# Altium PCB PCB1.PcbDoc (part 1 of 2)
Units mm, origin at the board's own origin, x right, y up, seen from the top; angles counter-clockwise.
Board outline 64.18 x 46.75 mm, 2 copper layers (Top Layer, Bottom Layer); 48 components, 57 nets, 248 pads, 92 vias.
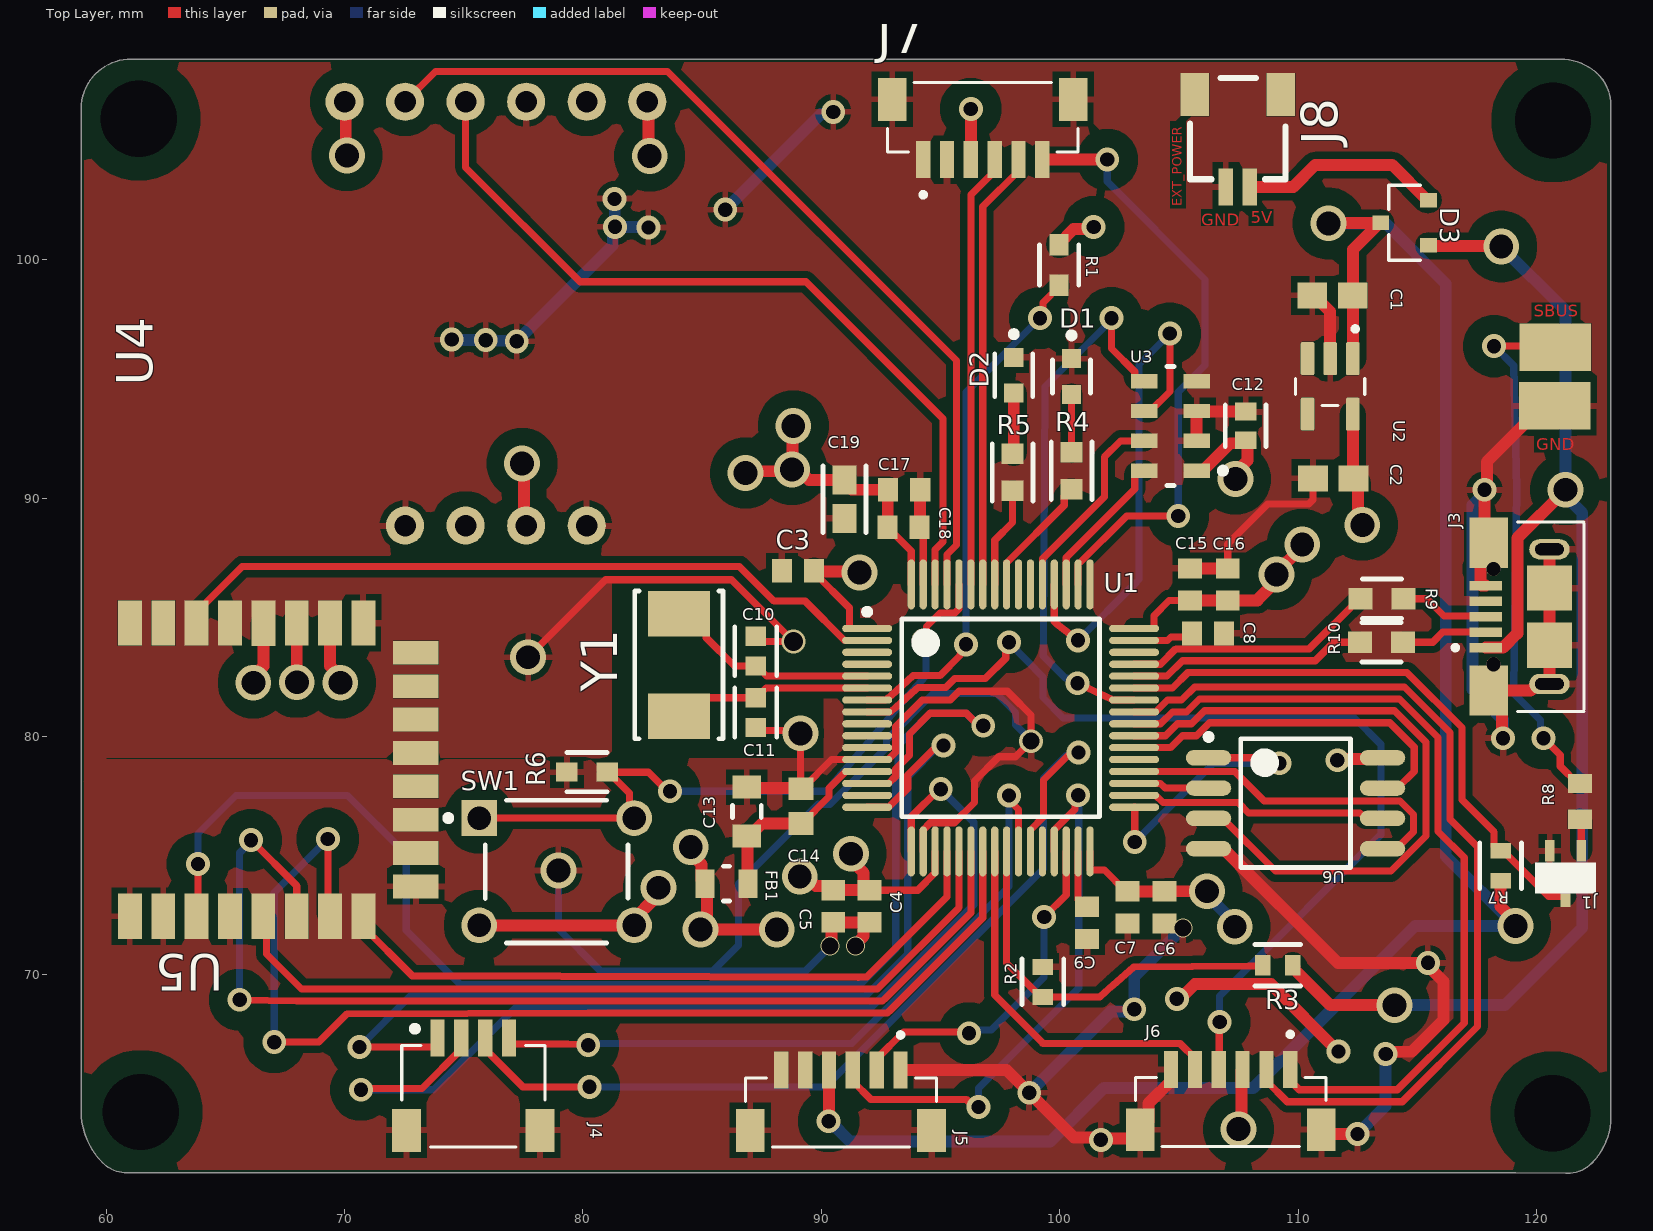
[diagram p0: Top Layer view]
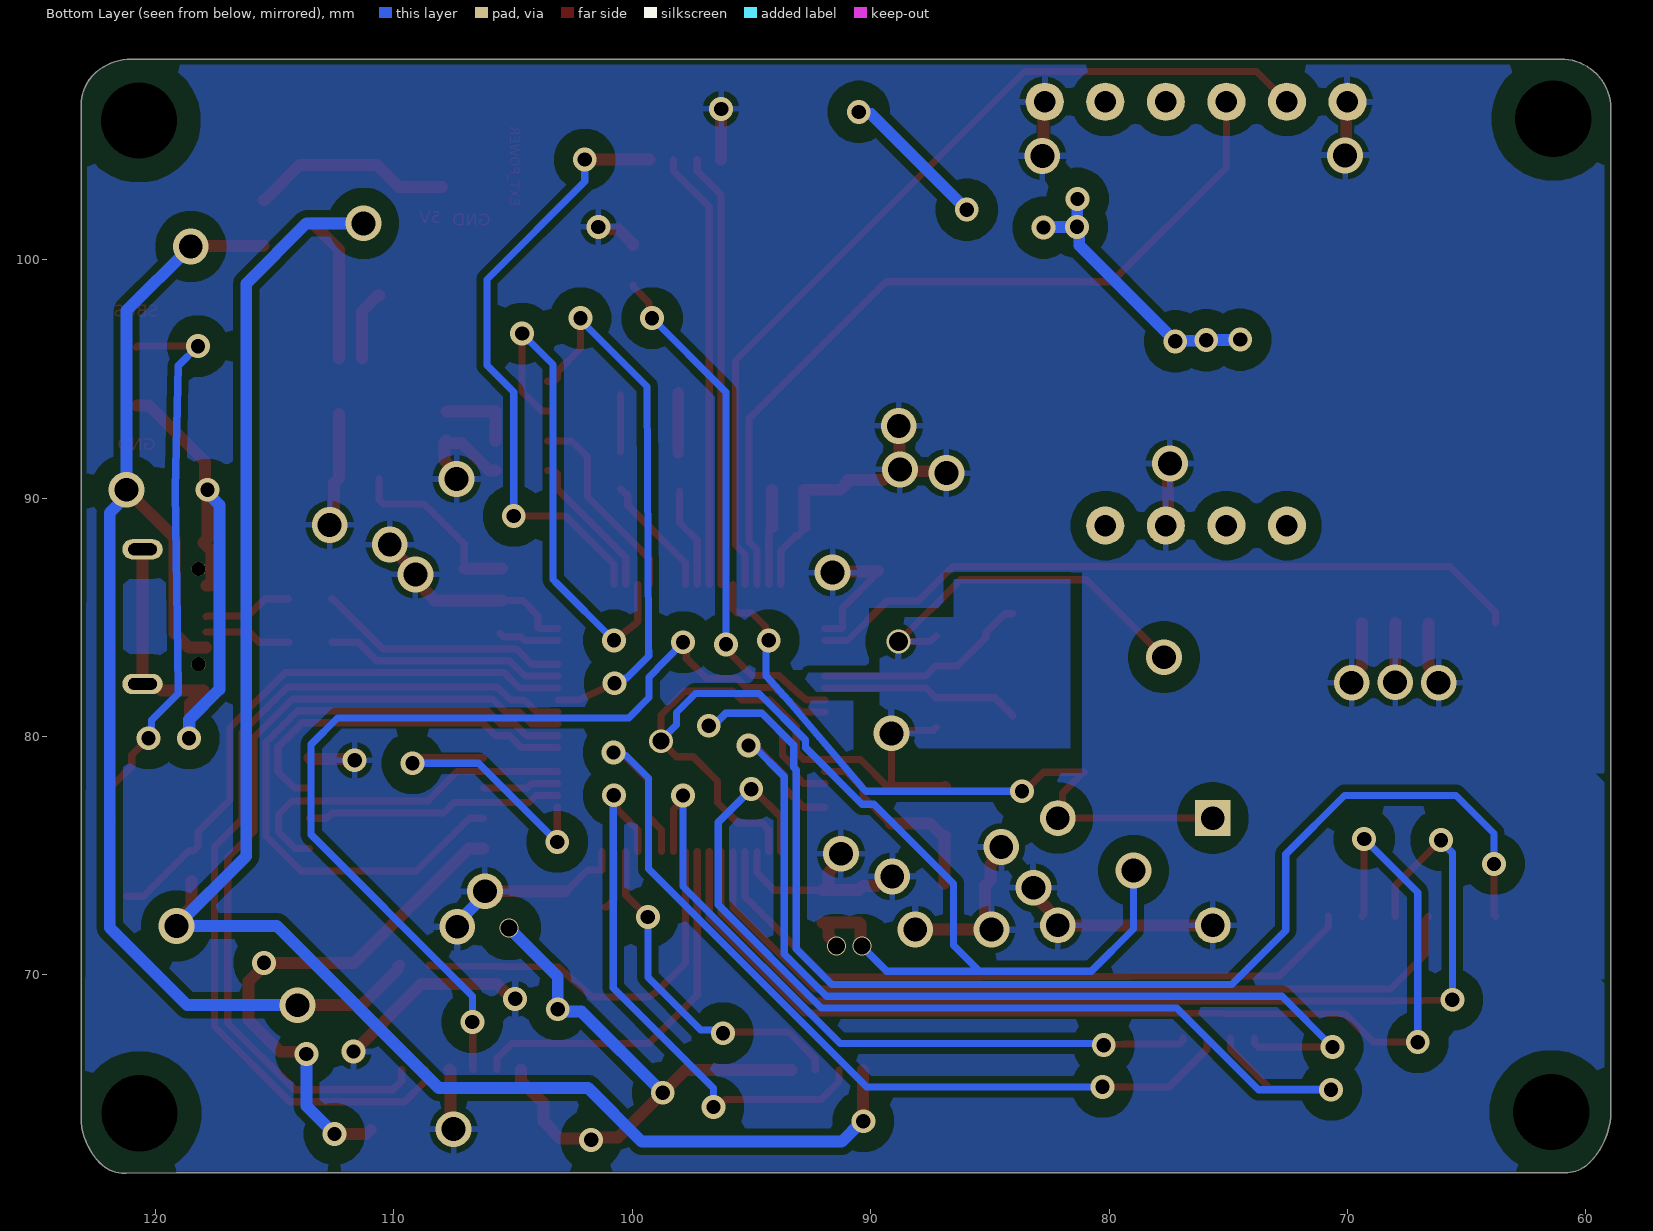
[diagram p1: Bottom Layer view, seen from below]
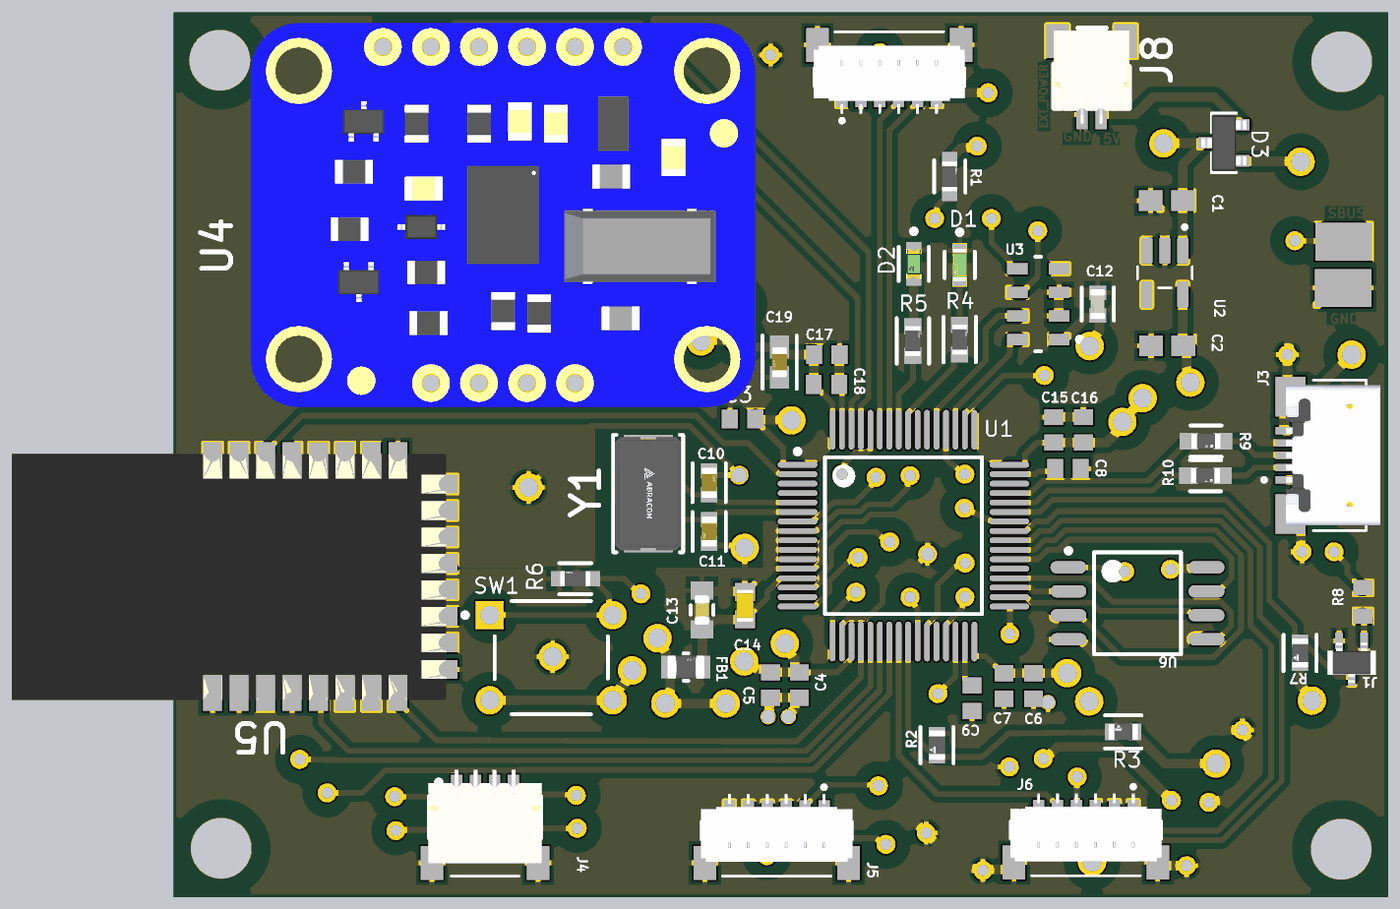
[diagram p2: 3D render of the assembled board from above, using the file's embedded part models]

## Layer stack, top to bottom
Top Solder: solder mask 0.0102, Solder Resist, Dk 3.5
Top Layer: signal copper 0.0356
Dielectric 1: dielectric 0.32, FR-4, Dk 4.8
Bottom Layer: signal copper 0.0356
Bottom Solder: solder mask 0.0102, Solder Resist, Dk 3.5

## Board outline
58.946,64.289 58.946,106.337 cw(c61.012,106.337) 59.551,107.797 cw(c61.048,106.3) 61.048,108.417 66.496,108.417 118.949,108.417 119.196,108.417 121.01,108.416 cw(c121.01,106.124) 122.631,107.744 122.6,107.767 cw(c121.324,106.491) 123.129,106.491 123.129,64.034 cw(c120.385,64.034) 122.325,62.094 cw(c121.299,63.12) 121.299,61.669 121.225,61.669 119.135,61.694 119.075,61.694 60.875,61.694 cw(c60.875,63.151) 59.844,62.121 cw(c62.012,64.289)

## Design rules (kind name [scope] priority, off if disabled: settings)
Clearance [All] p1: gap=0 ignorepadtopadclearanceinfootprint=FALSE except(0.2: Arc-Arc Arc-Track Track-Track; 0.3: Arc-Fill Arc-Poly Arc-Region Track-Fill Track-Poly Track-Region THPad-Fill THPad-Poly THPad-Region Via-Fill Via-Poly Via-Region Fill-Fill Fill-Poly Fill-Region Poly-Poly Poly-Region Region-Region; 0.7: Arc-Via Track-Via SMDPad-Via THPad-Via Via-Via; 1: Fill-Hole Poly-Hole Region-Hole)
PolygonConnect [All] p1: connectstyle=Relief reliefconductorwidth=0.254 reliefentries=4 polygonreliefangle="90 Angle" airgapwidth=0.254
RoutingVias [All] p1: holewidth=0.711 width=1.27 viastyle="Through Hole" minholewidth=0.711 minwidth=1.27 maxholewidth=0.711 maxwidth=1.27
SolderMaskExpansion [All] p1: expansion=0.102 istentingtop=FALSE
SupplyNets "Schematic Supply Nets_5" [InNet('3.3VA')] p1: voltage=0.000
SupplyNets "Schematic Supply Nets_4" [InNet('GND')] p2: voltage=0.000
SupplyNets "Schematic Supply Nets_3" [InNet('+5')] p3: voltage=0.000
SupplyNets "Schematic Supply Nets_2" [InNet('VDD')] p4: voltage=0.000
SupplyNets "Schematic Supply Nets_1" [InNet('5V_USB')] p5: voltage=0.000
SupplyNets "Schematic Supply Nets" [InNet('EXT_5V')] p6: voltage=0.000
UnRoutedNet [All] p1: checkbadconnections=TRUE
Width [All] p1: maxlimit=1 minlimit=0.3 preferedwidth=0.3
29 further rules are at their usual default settings.

## Classes and differential pairs
component class Sheet3: J3 J4 J5 J6 J7 J8 R9 R10
component class Sheet2: C12 J1 R7 R8 U3 U4 U5 U6
component class Sheet1: C1 C2 C3 C4 C5 C6 C7 C8 C9 C10 C11 C13 C14 C15 C16 C17 C18 C19 D1 D2 D3 FB1 R1 R2 R3 R4 R5 R6 SW1 U1 U2 Y1

## Components (designator, comment, footprint, x,y, rotation, side; value= is the part's Value field where it differs from the comment)
C1 "0603YG105ZAT4A" CAPC1608X90X35ML15T15 111.45,98.5 r0 top
C2 "0603YG105ZAT4A" CAPC1608X90X35ML15T15 111.475,90.825 r0 top
C3 "VJ0603Y104KXXAP" CAPC1608X92X38NL15T08 89.025,86.95 r0 top
C4 "VJ0603Y104KXXAP" CAPC1608X92X38NL15T08 92.025,72.875 r90 top
C5 "VJ0603Y104KXXAP" CAPC1608X92X38NL15T08 90.5,72.875 r90 top
C6 "VJ0603Y104KXXAP" CAPC1608X92X38NL15T08 104.4,72.825 r90 top
C7 "VJ0603Y104KXXAP" CAPC1608X92X38NL15T08 102.85,72.825 r90 top
C8 "VJ0603Y104KXXAP" CAPC1608X92X38NL15T08 106.225,84.325 r180 top
C9 "VJ0603Y104KXXAP" CAPC1608X92X38NL15T08 101.15,72.175 r90 top
C10 "06035A220JAT2A" FP-0603-L_1_6_0_15-W_0_81-IPC_C 87.25,83.575 r90 top
C11 "06035A220JAT2A" FP-0603-L_1_6_0_15-W_0_81-IPC_C 87.25,80.999 r270 top
C12 "C0603C104K4RACTU" FP-C0603C-CF-MFG 107.8,93.025 r90 top value="0.10 μF"
C13 "CGA3E2X7R1H104K080AA" FP-CGA3E-0_3-0_1-IPC_A 86.875,76.85 r90 top
C14 "GRM188R71H103KA01D" CAPC1608X90X35ML10T15 89.15,77.075 r270 top
C15 "VJ0603Y104KXXAP" CAPC1608X92X38NL15T08 105.475,86.375 r270 top
C16 "VJ0603Y104KXXAP" CAPC1608X92X38NL15T08 107.05,86.375 r270 top
C17 "VJ0603Y104KXXAP" CAPC1608X92X38NL15T08 93.475,90.35 r180 top
C18 "VJ0603Y104KXXAP" CAPC1608X92X38NL15T08 93.45,88.775 r180 top
C19 "GRM188R60J106ME47D" FP-GRM188-0_1-e0_2_0_55-IPC_A 90.975,89.95 r270 top
D1 "LG L29K-G2J1-24-Z" FP-LG_L29K-MFG 100.5,95.1 r270 top
D2 "VLMS1300-GS08" FP-6_541-5092_01-4-MFG 98.075,95.15 r270 top
D3 "BAT54C" SOT23-R 114.475,101.55 r90 top
FB1 "MPZ2012S101ATD25" FP-MPZ2012-MFG 86.025,73.825 r0 top
J1 "BC817W,115" SOT323 121.225,73.425 r180 top
J3 "U254-051T-4BH83-F1S" XKB_U254-051T-4BH83-F1S 120.55,85.025 r90 top
J4 "SM04B-SRSS-TB(LF)(SN)" JST_SM04B-SRSS-TB(LF)(SN) 75.4,67.35 r0 top
J5 "BM06B-SRSS-TB(LF)(SN)" JST_BM06B-SRSS-TB(LF)(SN) 90.825,64.225 r180 top
J6 "BM06B-SRSS-TB(LF)(SN)" JST_BM06B-SRSS-TB(LF)(SN) 107.175,64.25 r180 top
J7 "BM06B-SRSS-TB(LF)(SN)" JST_BM06B-SRSS-TB(LF)(SN) 96.775,105.975 r0 top
J8 "SM02B-SRSS-TB(LF)(SN)" SM02B-SRSS-TB(LF)(SN) 107.475,105.025 r180 top
R1 "AC0603FR-0710KL" FP-AC0603-MFG 99.975,99.775 r90 top
R2 "MCT06030C1002FP500" FP-MCT0603-IPC_C 99.3,69.7 r270 top
R3 "MCT06030C1002FP500" FP-MCT0603-IPC_C 109.15,70.4 r180 top
R4 "AC0603FR-071KL" FP-AC0603-IPC_B 100.5,91.15 r90 top
R5 "AC0603FR-071KL" FP-AC0603-IPC_B 98.025,91.075 r90 top
R6 "AC0603FR-0710KL" FP-AC0603-MFG 80.175,78.5 r180 top
R7 "MCT06030C1002FP500" FP-MCT0603-IPC_C 118.5,74.575 r270 top
R8 "RC0603JR-074K7L" RESC1608X55X25ML10T15 121.825,77.275 r270 top
R9 "CPF0603B22RE1" FP-CPF0603-MFG 113.525,85.775 r180 top value=22Ω
R10 "CPF0603B22RE1" FP-CPF0603-MFG 113.5,83.95 r180 top value=22Ω
SW1 "1825910-6" TECO-1825910-6_V 78.9,74.325 r0 top
U1 "STM32F405RGT6" STM-LQFP64_M 97.527,80.779 r0 top
U2 "MIC5504-3.3YM5_TR" SOT95P280X145-5N 111.35,94.685 r270 top
U3 "MS561101BA03-50" MSI-MS561101BA03-50-8_V 104.65,93.025 r180 top
U4 "BNO055" BNO055_MOD 63.015,87.575 r0 top
U5 "Component_2" BU01 73.368,85.108 r180 top
U6 "W25Q128FVSIG" WINB-SOIC-8_M 109.9,77.2 r0 top
Y1 "ABM7-8.000MHZ-8-R80-D2Y-T" FP-ABM7-MFG 84.025,83 r270 top

## Footprints (in the part's own frame and the unit in brackets; to place one, negate y for a bottom-side part, rotate by r counter-clockwise, add the part's x,y. Pads: shape width x height; smd on the part's side, far side on the other; paste and mask are expansions set on the pad)
BNO055_MOD [mm]
  round 1.6 hole 0.9: 1(19.685,19.05) 2(17.145,19.05) 3(14.605,19.05) 4(12.065,19.05) 5(9.525,19.05) 6(6.985,19.05) 7(17.145,1.27) 8(14.605,1.27) 9(12.065,1.27) 10(9.525,1.27)
  body extent 0,0 26.67,20.32, height 3.23
BU01 [mm]
  rect 1x1.9 smd: 1(12.375,0.35) 2(10.975,0.35) 3(9.575,0.35) 4(8.175,0.35) 5(6.768,0.358) 6(5.375,0.35) 7(3.975,0.35) 8(2.575,0.35) 17(2.575,12.65) 18(3.975,12.65) 19(5.375,12.65) 20(6.775,12.65) 21(8.175,12.65) 22(9.575,12.65) 23(10.975,12.65) 24(12.375,12.65)
  rect 1.9x1 smd: 9(0.375,1.6) 10(0.375,3) 11(0.375,4.4) 12(0.375,5.8) 13(0.375,7.2) 14(0.375,8.6) 15(0.375,10) 16(0.375,11.4)
  body extent 0.02,0.01 23.02,13.01
CAPC1608X90X35ML10T15 [mm] "Chip Capacitor, 2-Leads, Body 1.7x0.9mm, IPC Low Density"
  rect 0.95x1.05 smd: 1(-0.725,0) 2(0.725,0)
  body extent -0.85,-0.45 0.85,0.45, height 0.9
CAPC1608X90X35ML15T15 [mm] "Chip Capacitor, 2-Leads, Body 1.60x0.81mm, IPC Low Density"
  rect 1.25x1.1 smd: 1(-0.85,0) 2(0.85,0)
  body extent -0.88,-0.48 0.87,0.48, height 0.9
CAPC1608X92X38NL15T08 [mm] "Chip Capacitor, 2-Leads, Body 1.60x0.80mm, IPC Medium Density"
  rect 0.85x1 smd: 1(-0.675,0) 2(0.675,0)
  body extent -0.87,-0.48 0.87,0.47, height 0.92
FP-6_541-5092_01-4-MFG [mm]
  rect 0.8x0.8 smd paste+0 mask+0: 1(-0.75,0) 2(0.75,0)
  silkscreen extent -1.85,-0.8 0.9,0.8, body extent -1.25,-0.6 1.25,0.6, height 0.25
FP-0603-L_1_6_0_15-W_0_81-IPC_C [mm]
  rect 0.807x0.868 smd paste+0 mask+0: 1(-0.626,0) 2(0.626,0)
  silkscreen extent -1.03,-0.88 1.03,0.88, body extent -1.13,-0.58 1.13,0.58, height 0.25
FP-ABM7-MFG [mm]
  rect 1.9x2.6 smd paste+0 mask+0: 1(-2.15,0) 2(2.15,0)
  silkscreen extent -3.1,-1.85 3.1,1.85, body extent -3.2,-1.95 3.2,1.95, height 0.25
FP-AC0603-IPC_B [mm]
  rect 0.859x0.912 smd paste+0 mask+0: 1(-0.777,0) 2(0.777,0)
  silkscreen extent -1.21,-0.86 1.21,0.86, body extent -1.46,-0.71 1.46,0.71, height 0.25
FP-AC0603-MFG [mm]
  rect 0.9x0.8 smd paste+0 mask+0: 1(-0.85,0) 2(0.85,0)
  silkscreen extent -0.85,-0.82 0.85,0.82, body extent -1.4,-0.55 1.4,0.55, height 0.25
FP-C0603C-CF-MFG [mm]
  rect 0.75x0.9 smd paste+0 mask+0: 1(-0.6,0) 2(0.6,0)
  silkscreen extent -0.87,-0.85 0.88,0.85, body extent -1.2,-0.6 1.2,0.6, height 0.25
FP-CGA3E-0_3-0_1-IPC_A [mm]
  rect 0.956x1.206 smd paste+0 mask+0: 1(-1.025,0) 2(1.025,0)
  silkscreen extent -0.25,-0.6 0.25,0.6, body extent -2,-1.1 2,1.1, height 0.25
FP-CPF0603-MFG [mm]
  rect 1x0.9 smd paste+0 mask+0: 1(-0.9,0) 2(0.9,0)
  silkscreen extent -0.82,-0.82 0.82,0.82, body extent -1.5,-0.55 1.5,0.55, height 0.25
FP-GRM188-0_1-e0_2_0_55-IPC_A [mm]
  rect 1.208x1.012 smd paste+0 mask+0: 1(-0.802,0) 2(0.802,0)
  silkscreen extent -1.41,-0.91 1.41,0.91, body extent -1.91,-1.01 1.91,1.01, height 0.25
FP-LG_L29K-MFG [mm]
  rect 0.8x0.8 smd paste-1000 mask+0: 1(-0.75,0) 2(0.75,0)
  silkscreen extent -1.85,-0.8 0.7,0.8, body extent -1.25,-0.55 1.25,0.55, height 0.25
FP-MCT0603-IPC_C [mm]
  rect 0.664x0.862 smd paste+0 mask+0: 1(-0.629,0) 2(0.629,0)
  silkscreen extent -0.96,-0.87 0.96,0.87, body extent -1.06,-0.58 1.06,0.58, height 0.25
FP-MPZ2012-MFG [mm]
  rect 0.8x1.2 smd paste+0 mask+0: 1(-0.9,0) 2(0.9,0)
  silkscreen extent -0.13,-0.72 0.13,0.72, body extent -1.4,-0.82 1.4,0.82, height 0.25
JST_BM06B-SRSS-TB(LF)(SN) [mm]
  rect 0.6x1.55 smd: 1(-2.5,-1.775) 2(-1.5,-1.775) 3(-0.5,-1.775) 4(0.5,-1.775) 5(1.5,-1.775) 6(2.5,-1.775)
  rect 1.2x1.8 smd: S1(-3.8,0.75) S2(3.8,0.75)
  silkscreen extent -4,-3.35 4,1.45, body extent -4,-2.9 4,0.7, height 4.25
JST_SM04B-SRSS-TB(LF)(SN) [mm]
  rect 0.6x1.55 smd: 1(-1.5,0) 2(-0.5,0) 3(0.5,0) 4(1.5,0)
  rect 1.2x1.8 smd: S1(-2.8,-3.875) S2(2.8,-3.875)
  silkscreen extent -3,-4.57 3,0.48, body extent -3,-3.9 3,1.05, height 3.25
MSI-MS561101BA03-50-8_V [mm] "SMD, 8-Leads, Body 5x3mm, Pitch 1.25mm"
  rect 1.1x0.6 smd: 1(-1.1,1.875) 2(-1.1,0.625) 3(-1.1,-0.625) 4(-1.1,-1.875) 5(1.1,-1.875) 6(1.1,-0.625) 7(1.1,0.625) 8(1.1,1.875)
  silkscreen extent -2.32,-2.5 0.15,2.5, body extent -1.5,-2.5 1.5,2.5, height 1
RESC1608X55X25ML10T15 [mm] "Chip Resistor, 2-Leads, Body 1.60x0.80mm, IPC Low Density"
  rect 0.8x1 smd: 1(-0.75,0) 2(0.75,0)
  body extent -0.85,-0.45 0.85,0.45, height 0.55
SM02B-SRSS-TB(LF)(SN) [mm]
  rect 0.6x1.55 smd: 1(-0.5,1.975) 2(0.5,1.975)
  rect 1.2x1.8 smd: 3(-1.8,-1.9) 4(1.8,-1.9)
  silkscreen extent -2,-2.6 2,1.65, body extent -2,-2.47 2,2.47, height 2.95
SOT23-R [mm]
  rect 0.6x0.7 smd: 1(-0.95,-1) 2(0.95,-1) 3(0,1)
  silkscreen extent -1.57,-0.65 1.57,0.66, body extent -1.46,-1.2 1.46,1.2, height 1.2
SOT95P280X145-5N [mm]
  rrect25% 1.39x0.58 smd: 1(-1.165,0.95) 2(-1.165,0) 3(-1.165,-0.95) 4(1.165,-0.95) 5(1.165,0.95)
  silkscreen extent -2.51,-1.45 0.8,1.45, body extent -2.54,-2.54 2.54,2.54, height 2.54
SOT323 [mil]
  rect 16x35 smd: BASE(-26,-70) COLLECTOR(0,5) EMITTER(26,-70)
  silkscreen extent -50,-50 50,0, body extent -39,-66 39,16, height 43
STM-LQFP64_M [mm] "Thin QFP, 64-Leads, Body 10x10mm, Pitch 0.5mm, IPC Low Density"
  oval 2.1x0.3 smd: 1(-5.6,3.75) 2(-5.6,3.25) 3(-5.6,2.75) 4(-5.6,2.25) 5(-5.6,1.75) 6(-5.6,1.25) 7(-5.6,0.75) 8(-5.6,0.25) 9(-5.6,-0.25) 10(-5.6,-0.75) 11(-5.6,-1.25) 12(-5.6,-1.75) 13(-5.6,-2.25) 14(-5.6,-2.75) 15(-5.6,-3.25) 16(-5.6,-3.75) 33(5.6,-3.75) 34(5.6,-3.25) 35(5.6,-2.75) 36(5.6,-2.25) 37(5.6,-1.75) 38(5.6,-1.25) 39(5.6,-0.75) 40(5.6,-0.25) 41(5.6,0.25) 42(5.6,0.75) 43(5.6,1.25) 44(5.6,1.75) 45(5.6,2.25) 46(5.6,2.75) 47(5.6,3.25) 48(5.6,3.75)
  oval 0.3x2.1 smd: 17(-3.75,-5.6) 18(-3.25,-5.6) 19(-2.75,-5.6) 20(-2.25,-5.6) 21(-1.75,-5.6) 22(-1.25,-5.6) 23(-0.75,-5.6) 24(-0.25,-5.6) 25(0.25,-5.6) 26(0.75,-5.6) 27(1.25,-5.6) 28(1.75,-5.6) 29(2.25,-5.6) 30(2.75,-5.6) 31(3.25,-5.6) 32(3.75,-5.6) 49(3.75,5.6) 50(3.25,5.6) 51(2.75,5.6) 52(2.25,5.6) 53(1.75,5.6) 54(1.25,5.6) 55(0.75,5.6) 56(0.25,5.6) 57(-0.25,5.6) 58(-0.75,5.6) 59(-1.25,5.6) 60(-1.75,5.6) 61(-2.25,5.6) 62(-2.75,5.6) 63(-3.25,5.6) 64(-3.75,5.6)
  silkscreen extent -5.72,-4.15 4.15,4.57, body extent -5,-5 5,5, height 1.6
TECO-1825910-6_V [mm] "Switch, 4-Leads, Body 5.99x5.99mm"
  rect 1.5x1.5 hole 0.99: 1(-3.25,2.25)
  round 1.5 hole 0.99: 2(3.25,2.25) 3(-3.25,-2.25) 4(3.25,-2.25)
  silkscreen extent -4.67,-2.99 2.99,3, body extent -3,-2.99 2.99,3, height 5
WINB-SOIC-8_M [mm] "SOIC, 8-Leads, Body 5.4x5.4mm, Pitch 1.27mm, IPC Low Density"
  oval 1.9x0.65 smd: 1(-3.65,1.905) 2(-3.65,0.635) 3(-3.65,-0.635) 4(-3.65,-1.905) 5(3.65,-1.905) 6(3.65,-0.635) 7(3.65,0.635) 8(3.65,1.905)
  silkscreen extent -3.77,-2.7 2.3,2.9, body extent -2.7,-2.7 2.7,2.7, height 2.16
XKB_U254-051T-4BH83-F1S [mm]
  rect 0.4x1.35 smd: 1(-1.3,2.675) 2(-0.65,2.675) 3(0,2.675) 4(0.65,2.675) 5(1.3,2.675)
  rect 2.1x1.6 smd: S1(-3.1,2.55) S2(3.1,2.55)
  rect 1.9x1.9 smd: S3(-1.2,0) S4(1.2,0)
  oval 0.85x1.7 hole 0.5 slot 1.2 at 90 deg: S5(-2.825,0) S6(2.825,0)
  round 0.6 hole 0.6 unplated: ""(-2,2.35) ""(2,2.35)
  silkscreen extent -3.98,-1.45 3.98,4.05, body extent -3.7,-2.2 3.7,2.8, height 2.3

## Part data
C1 C2: library part CMP-2006-04543-1, Manufacturer="AVX Interconnect / Elco", Part Number=0603YG105ZAT4A
C3 C4 C5 C6 C7 C15 C16 C17 C18: library part CMP-2006-01166-1, Manufacturer=Vitramon, Part Number=VJ0603Y104KXXAP
C8 C9: library part CMP-2006-01166-1, "100nf", Manufacturer=Vitramon, Part Number=VJ0603Y104KXXAP
C10 C11: library part CMP-2006-04207-3, "General Purpose Ceramic Capacitor, 0603, 22pF, 5%, NP0, 30ppm/°C, 50V", Capacitance=22pF, Case Code (Imperial)=0603, Case Code (Metric)=1608, Dielectric=C0G, Dielectric Material=Ceramic, Insulation Resistance=100GR, Max Operating Temperature=125°C, Min Operating Temperature=-55°C, Package Quantity=1, Temperature Coefficient=30ppm/°C, Tolerance=5%, Voltage=50V, Case/Package=0603, Contact Plating=Tin, Depth=0.81mm, Height=0.63mm, Lead Free="Lead Free", Length=1.6mm, Mount="Surface Mount", Number of Pins=2, Packaging="Tape and Reel", Radiation Hardening=No, REACH SVHC="No SVHC", RoHS Compliant=Yes, Termination=SMD/SMT, Thickness=0.035inch, Voltage Rating=50V, Voltage Rating (DC)=50V, Width=0.81mm
C12: library part CMP-2006-03811-3, "Capacitor; Ceramic; Cap; .100uF; Tol 10%; SMT; Vol-Rtg 16V; X7R; Tape and Reel", Capacitance="0.10 μF", Manufacturer=KEMET, Package=C0603C-CF, Temperature="-55°C to +125°C", Temperature Characteristic=X7R, Temperature Coefficient=30ppm/°C, Temperature Range High=+125°C, Temperature Range Low=-55°C, Tolerance=0.1, Voltage Rating="16 V", Automotive=Yes, Automotive Grade="Grade 1", Category=Cap, ComponentLink2Description=Datasheet, ComponentLink2URL=https://api.kemet.com/component-edge/download/datasheet/C0603C100J5GACAUTO.pdf, Device Class L1="Passive Components", Device Class L2=Capacitors, Device Class L3="Ceramic Capacitors", Digikey Description="Capacitor; Ceramic; Cap; .100uF; Tol 10%; SMT; Vol-Rtg 16V; X7R; Tape and Reel", Height=0.87mm, Lead Free=Yes, Manufacturer Part Number=C0603C104K4RACTU, Material=Ceramic, Mouser Description="Multilayer Ceramic Capacitors MLCC - SMD/SMT 16volts 0.1uF 10% X7R 10%", Octopart=https://octopart.com/c0603c104k4ractu-kemet-93067, RoHS=TRUE
C13: library part CMP-2000-07546-2, "Cap Ceramic 100nF 50V X7R 10% Pad SMD 0603 +125°C Automotive T/R", Capacitance=100nF, Case Code (Imperial)=0603, Case Code (Metric)=1608, Dielectric=X7R, Max Operating Temperature=125°C, Min Operating Temperature=-55°C, Package Quantity=1, Ratings=AEC-Q200, Tolerance=10%, Voltage=50V, Case/Package=0603, Composition=Ceramic, Depth=0.8mm, Height=0.8mm, Lead Free="Lead Free", Length=1.6mm, Mount="Surface Mount", Packaging="Tape and Reel", Radiation Hardening=No, REACH SVHC="No SVHC", Termination=SMD/SMT, Thickness=0.035inch, Voltage Rating=50V, Voltage Rating (DC)=50V, Weight=7.1E-05oz, Width=0.8mm
C14: library part CMP-2100-03642-1, "Chip Capacitor, 10 nF, +/- 10%, 50 V, -55 to 125 degC, 0603 (1608 Metric), RoHS, Tape and Reel", Capacitance=10nF, Case Code (Imperial)=0603, Case Code (Metric)=1608, Dielectric=X7R, Dielectric Material=Ceramic, Insulation Resistance=10GR, Manufacturer=Murata, Max Operating Temperature=125degC, Min Operating Temperature=-55degC, Package Description="2-Pin Surface Mount Device, Body 1.6 x 0.8 mm", Package Quantity=1, Tolerance=10%, Voltage=50V, Case/Package=0603, Datasheet URL=http://search.murata.co.jp/Ceramy/image/img/A01X/G101/ENG/GRM188R71H103KA01-01.pdf, Datasheet Version=42401.0, Depth=0.8mm, Height=0.8mm, Lead Free=LeadFree, Length=1.6mm, Manufacturer URL=http://www.murata.com/, Material=Ceramic, Mount=SurfaceMount, Number of Pins=2, Package Reference=0603, Packaging=TapeandReel, REACH SVHC=Unknown, RoHSCompliant=True, Termination=SMD/SMT, Thickness=0.035inch, Voltage Rating=50V, Voltage Rating (DC)=50V, Width=0.031inch
C19: library part CMP-2006-02792-2, "Chip Multilayer Ceramic Capacitors for General Purpose, 0603, 10uF, X5R, 15%, 20%, 6.3V", Capacitance=10uF, Case Code (Imperial)=0603, Case Code (Metric)=1608, Dielectric=X5R, Max Operating Temperature=85°C, Min Operating Temperature=-55°C, Package Quantity=4000, Tolerance=20%, Voltage=6.3V, Case/Package=0603, Depth=0.8mm, Height=0.8mm, Lead Free="Lead Free", Length=1.6mm, Material=Ceramic, Mount="Surface Mount", Packaging="Tape and Reel", Radiation Hardening=No, REACH SVHC="No SVHC", Termination=SMD/SMT, Thickness=0.035inch, Voltage Rating=6.3V, Voltage Rating (DC)=6.3V, Width=0.031inch
D1: library part CMP-62016-000024-1, "LED GREEN DIFFUSED 0603 SMD", Case Code (Imperial)=0603, Case Code (Metric)=1608, Color=Green, Forward Current=20mA, Forward Voltage=2.2V, Lens Color=White, Max Operating Temperature=100°C, Min Operating Temperature=-40°C, Package Quantity=5000, Reverse Voltage=12V, Test Current=2mA, Case/Package=0603, Depth=0.8mm, Dominant Wavelength=570nm, Height=0.65mm, Illumination Color=Green, Length=1.3mm, Lens Size=0.8mm, Lens Style=Flat, Lens Transparency=Diffused, Luminous Flux=0.012lm, Luminous Intensity=5.6mcd, Mount="Surface Mount", Number of Elements=1, Number of LEDs=1, Number of Pins=2, Packaging="Tape and Reel", Radiation Hardening=No, Viewing Angle=160°, Width=0.8mm
D2: library part CMP-02520-000012-1, "LED RED 0603 SMD", Ambient Temperature Range High=+85°C, Ambient Temperature Range Low=-35°C, Colour=Red, Forward Current=20mA, Forward Voltage=2V, Manufacturer=Vishay, Package=6.541-5092.01-4, Power Dissipation=75mW, Reverse Voltage=5V, Temperature="-35°C to +85°C", Automotive=No, Category=Diode, ComponentLink2Description=Datasheet, ComponentLink2URL=http://www.vishay.com/docs/82437/vlmo1300.pdf, Device Class L1=Optoelectronics, Device Class L2=LEDs, Device Class L3=unset, Digikey Description="LED RED 0603 SMD", Height=1mm, Lead Free=Yes, Led Orientation="Top View", Luminous Intensity=54mcd, Manufacturer Part Number=VLMS1300-GS08, Mouser Description="Standard LEDs - SMD Super Red Clear Non-Diff", Octopart=https://octopart.com/vlms1300-gs08-vishay-21709201, Peak Emmision Wavelength=639nm, RoHS=TRUE, Temperature Range High=+85°C, Temperature Range Low=-35°C, Viewing Angle=130°, Wavelength=631nm
D3: "DIODE, SCHOTTKY, DUAL; Diode Type:Schottky; Voltage, Vrrm:30V; Current, If AV:300mA; Current, Ifsm:1A; Voltage, Vf Max:0.4V; Max Junction Temperature, Tj:150Â°C; Termination Type:SMD; Case Style:SOT-23; No. of Pins:3; Current, If ;RoHS Compliant: Yes", Package="SOT-23-3 ON Semiconductor", Check_prices=https://www.snapeda.com/parts/BAT54C/Onsemi/view-part/?ref=eda, MF="ON Semiconductor", MP=BAT54C, SnapEDA_Link=https://www.snapeda.com/parts/BAT54C/Onsemi/view-part/?ref=snap
FB1: library part CMP-08257-000007-1, "FERRITE BEAD 100 OHM 0805 1LN", Case Code (Imperial)=0805, Case Code (Metric)=2012, DC Resistance (DCR)=20mR, Max Current Rating=4A, Max Operating Temperature=125°C, Min Operating Temperature=-55°C, Package Quantity=4000, Ratings=AEC-Q200, Test Frequency=100MHz, Tolerance=25%, Case/Package=0805, Core Material=Ferrite, Depth=1.25mm, Height=0.85mm, Impedance=100R, Lead Free="Lead Free", Length=0.079inch, Max DC Current=4A, Mount="Surface Mount", Number of Lines=1, Packaging="Tape and Reel", Termination=SMD/SMT, Weight=0.000194oz, Width=1.25mm
J1: "Bipolar (BJT) Transistor NPN 45 V 500 mA 100MHz 200 mW Surface Mount SOT-323", Package="SC-70-3 Nexperia USA Inc.", Availability="In Stock", Check_prices=https://www.snapeda.com/parts/BC817W,115/Nexperia/view-part/?ref=eda, MF="Nexperia USA", MP=BC817W,115, Price=None, Purchase-URL=https://pricing.snapeda.com/search/part/BC817W,115/?ref=eda, SnapEDA_Link=https://www.snapeda.com/parts/BC817W,115/Nexperia/view-part/?ref=snap
J3: "USB - Micro B Female USB 2 5 SMD USB Connectors RoHS", Package=Package, Check_prices=https://www.snapeda.com/parts/U254-051T-4BH83-F1S/XKB+Industrial+Precision/view-part/?ref=eda, MF="XKB Industrial Precision", MP=U254-051T-4BH83-F1S, SnapEDA_Link=https://www.snapeda.com/parts/U254-051T-4BH83-F1S/XKB+Industrial+Precision/view-part/?ref=snap
J4: "Connector Header Surface Mount, Right Angle 4 position 0.039 (1.00mm)", Package=None, Check_prices=https://www.snapeda.com/parts/SM04B-SRSS-TB(LF)(SN)/JST/view-part/?ref=eda, MF="JST Sales", MP=SM04B-SRSS-TB(LF)(SN), SnapEDA_Link=https://www.snapeda.com/parts/SM04B-SRSS-TB(LF)(SN)/JST/view-part/?ref=snap
J5 J6 J7: Package=None, Availability=Unavailable, MP=BM06B-SRSS-TB(LF)(SN), Price=None
J8: "Connector Header Surface Mount, Right Angle 2 position 0.039 (1.00mm)", Package=None, Check_prices=https://www.snapeda.com/parts/SM02B-SRSS-TB(LF)(SN)/JST/view-part/?ref=eda, MF="JST Sales", MP=SM02B-SRSS-TB(LF)(SN), SnapEDA_Link=https://www.snapeda.com/parts/SM02B-SRSS-TB(LF)(SN)/JST/view-part/?ref=snap
R1 R6: library part CMP-2000-04818-3, "RES 10KΩ 1.00% 0.1W 0603", Case Code (Imperial)=0603, Case Code (Metric)=1608, Max Operating Temperature=155°C, Max Power Dissipation=100mW, Min Operating Temperature=-55°C, Package Quantity=1, Ratings=AEC-Q200, Resistance=10kR, Resistor Type="Thick Film", Temperature Coefficient=100ppm/°C, Tolerance=1%, Voltage Rating=50V, Case/Package=0603, Construction=Rectangular, Depth=0.8mm, Features="Moisture Resistant", Height=0.45mm, Lead Free="Lead Free", Length=1.6mm, Military Standard=Not, Mount="Surface Mount", Number of Terminations=2, Packaging="Tape and Reel", Power Rating=100mW, RoHS Compliant=Yes, Series=AC, Size Code=0603, Termination=SMD/SMT, Width=0.8mm
R2 R3 R7: library part CMP-02407-000418-1, "RES SMD 100 OHM 1% 1/8W 0603", Case Code (Imperial)=0603, Case Code (Metric)=1608, Max Operating Temperature=125°C, Max Power Dissipation=125mW, Min Operating Temperature=-55°C, Package Quantity=1, Power Rating=100mW, Resistance=10kR, Temperature Coefficient=50ppm/°C, Tolerance=1%, Voltage Rating=75V, Case/Package=0603, Composition="Thin Film", Contact Plating=Tin, Depth=0.85mm, Height=0.022inch, Lead Free="Lead Free", Length=1.55mm, Military Standard=Not, Mount="Surface Mount", Number of Terminations=2, Packaging="Tape and Reel", Radiation Hardening=No, Voltage Rating (DC)=75V, Width=0.8mm
R4 R5: library part CMP-2000-04828-3, "RES 1kΩ 1.00% 0.1W 0603", Case Code (Imperial)=0603, Case Code (Metric)=1608, Max Operating Temperature=155°C, Max Power Dissipation=100mW, Min Operating Temperature=-55°C, Package Quantity=1, Ratings=AEC-Q200, Resistance=1kR, Resistor Type="Thick Film", Temperature Coefficient=100ppm/°C, Tolerance=1%, Voltage Rating=50V, Case/Package=0603, Construction=Rectangular, Depth=0.8mm, Features="Moisture Resistant", Height=0.022inch, Lead Free="Lead Free", Length=0.063inch, Military Standard=Not, Number of Terminations=2, Packaging="Tape and Reel", Power Rating=100mW, RoHS Compliant=Yes, Series=AC, Size Code=0603, Termination=SMD/SMT, Width=0.031inch
R8: library part CMP-2000-05024-1, "Chip Resistor, 4.7 KOhm, +/- 5%, 100 mW, -55 to 155 degC, 0603 (1608 Metric), RoHS, Tape and Reel", Case Code - in=0603, Case Code - mm=1608, Manufacturer=Yageo, Operating Temperature Range=-55Cto+155C, Package Description="2-Pin Surface Mount Device, Body 1.6 x 0.8 mm", Package Reference=603, Power Rating=100mW, Resistance=4.7kOhms, Temperature Coefficient=100PPM/C, Tolerance=5%, Voltage Rating=50V, Datasheet URL=http://www.yageo.com/documents/recent/PYu-RC_Group_51_RoHS_L_04.pdf, Datasheet Version="Rev. 4, 02/2016", Manufacturer URL=http://www.yageo.com/, Packaging=Reel, Product=ThickFilmResistorsGeneralPurpose, Series=RC, Termination Style=SMD/SMT
R9 R10: library part CMP-03211-007811-1, "RES SMD 22Ω 0.1% 1/16W 0603", Manufacturer="TE Connectivity", Package=CPF0603, Power Rating=0.063W, Resistance=22Ω, Temperature="-55°C to +155°C", Temperature Coefficient=25ppm/°C, Temperature Range High=+155°C, Temperature Range Low=-55°C, Tolerance=0.1%, Voltage Rating=50V, Automotive=No, Category=Res, ComponentLink2Description=Datasheet, ComponentLink2URL=https://www.te.com/commerce/DocumentDelivery/DDEController?Action=showdoc&DocId=Data+Sheet%7F1773200%7FM%7Fpdf%7FEnglish%7FENG_DS_1773200_M.pdf%7F3-1676481-2, Composition="Thin Film", Device Class L1="Passive Components", Device Class L2=Resistors, Device Class L3="Chip SMD Resistors", Height=0.55mm, Ipc Land Pattern Name=RESC15580X45, Lead Free=Yes, Manufacturer Part Number=CPF0603B22RE1, Octopart=https://octopart.com/cpf0603b22re1-te+connectivity-9539398, octopart_url=https://octopart.com/cpf0603b22re1-te+connectivity-9539398, Packaging="1k Reel", RoHS=TRUE, Series=CPF
SW1: library part CMP-1684-00021-1, "Tact Switch, SPST-NO, 0.05 A, -35 to 85 degC, 4-Pin THD, RoHS, Bulk", Actuator Color=Black, Contact Rating @ Voltage=0.05A@24VDC, Dielectric Strength=500VAC, Manufacturer="TE Connectivity", Maximum AC Voltage Rating=N/A, Maximum Contact Resistance=100mOhm, Maximum DC Voltage Rating=24V, Minimum Insulation Resistance=100MOhm, Operating Temperature=-35to85C, Package Description="4-Pin Through Hole Device, Body 5.99 x 5.99 mm, Pitch 6.5 mm", Package Reference=THD, Actuator Length=1.4mm, Actuator Material=PolybutyleneTerephthalate, Actuator Style=RoundButton, Base Material=N/A, Body Orientation=Straight, Bushing Type=Unthreaded, Contact Material=CopperAlloy, Contact Plating=Silver, Datasheet URL=http://www.te.com/commerce/DocumentDelivery/DDEController?Action=showdoc&DocId=Customer+Drawing%7F1825910%7FC9%7Fpdf%7FEnglish%7FENG_CD_1825910_C9.pdf%7F1825910-6, Datasheet Version="Rev. C9", Dimension=5.99x5mm, Electrical Life=100000Cycles, Family=1825910, Function=MomentaryContact, Housing Material=N/A, Illumination=N/R, Manufacturer URL=http://www.te.com, Mechanical Life=100000Cycles, Mounting=ThroughHole, Packaging=N/A, Part No=1825910-6, Pole Throw Configuration=SPST, Product Weight=N/A, RoHS=Yes, Seal Description=N/A, Seal Location=N/A, Switch Configuration=OFF(ON), Terminal Type=PCPins, Thread Size=N/R
U1: library part CMP-0243-00019-3, "ARM Cortex-M4 32-bit MCU+FPU, 210 DMIPS, 1024 kB Flash, 192 kB Internal RAM, 51 I/Os, 64-pin LQFP, -40 to 85 degC, Tray", I/Os (High Current)=51, Manufacturer=STMicroelectronics, Operating Frequency(F) (Processor speed) (MHz)=168, Supply Voltage(Vcc) max (V)=3.6, Supply Voltage(Vcc) min (V)=1.8, ComponentLink1Description="Manufacturer URL", ComponentLink1URL=http://www.st.com/web/en/home.html, ComponentLink2Description=Datasheet, ComponentLink2URL=http://www.st.com/st-web-ui/static/active/en/resource/technical/document/datasheet/DM00037051.pdf, ComponentLink3Description="Package Specification", ComponentLink3URL=http://www.st.com/st-web-ui/static/active/en/resource/technical/document/datasheet/DM00037051.pdf, Core="ARM Cortex-M4", D/A Converter=2x12-bit, DatasheetVersion="Rev. 4", FLASH Size (Prog) (kB)=1024, Internal RAM Size (kB)=192, Mounting Technology="Surface Mount", PackageDescription="64-Pin Low Profile Quad Flat Package, 10 x 10 mm Body, 0.5 mm Pitch", PackageReference=LQFP64, PackageVersion="Rev. 4, 06/2013", Packing=Tray, PartNumber=STM32F405RGT6
U2: "Linear Voltage Regulator IC Positive Fixed 1 Output 300mA SOT-23-5", Package="SOT-23 Microchip", Check_prices=https://www.snapeda.com/parts/MIC5504-3.3YM5%20TR/Microchip/view-part/?ref=eda, MF=Microchip, MP="MIC5504-3.3YM5 TR", SnapEDA_Link=https://www.snapeda.com/parts/MIC5504-3.3YM5%20TR/Microchip/view-part/?ref=snap
U3: library part CMP-2000-05251-1, "Barometric Pressure Sensor, with Stainless Steel Cap, 1.8 to 3.6 V, -45 to 85 degC, 8-Pin QFN, RoHS, Tape and Reel", Manufacturer="Measurement Specialties", Operating Pressure Max=1200mbar, Operating Pressure Min=10mbar, Operating Temperature Max=85degC, Operating Temperature Min=-40degC, Package Description="8-Pin Surface Mount Device, Body 5 x 3 mm, Pitch 1.25 mm", Package Reference=MS561101BA03-50-8, Sensor Case Style=QFN, Supply Current=12.5µA, Supply Voltage Max=3.6V, Supply Voltage Min=1.8V, Connection Size=0.5mm, Datasheet URL=http://www.te.com/commerce/DocumentDelivery/DDEController?Action=srchrtrv&DocNm=MS5611-01BA03&DocType=Data+Sheet&DocLang=English&DocFormat=pdf&PartCntxt=CAT-BLPS0036, Datasheet Version=Sep-15, Manufacturer URL=http://www.meas-spec.com/, No. of Pins=8, Pressure Type=Barometric, SVHC=NoSVHC(20-Jun-2013)
U4: library part Component_1
U6: library part CMP-2000-05005-1, "3V 128M-Bit Serial Flash Memory with Dual/Quad SPI & QPI, 2.7 to 3.6 V, -40 to 85 degC, 8-Pin SOIC, RoHS, Tape and Reel", Manufacturer=Winbond, Operating Supply Voltage (Max)=3.6V, Operating Supply Voltage (Min)=2.7V, Operating Supply Voltage (Typ)=3/3.3V, Operating Temp Range=-40Cto85C, Operating Temperature (Max)=85C, Operating Temperature (Min)=-40C, Operating Temperature Classification=Industrial, Package Description="8-Pin Small Outline Integrated Circuit, Body 5.28 x 5.28 mm, Pitch 1.27 mm", Package Reference=SS-8, Package Type=SOICW, Program/Erase Volt (Typ)=2.7to3.6V, Supply Current=20mA, Access Time (Max)=7ns, Address Bus=24b, Boot Type=NotRequired, Cell Type=NOR, Datasheet URL=http://download.siliconexpert.com/pdfs/2015/11/30/6/42/17/890/win_/manual/3w25q128fv20rev.l2008242015.pdf, Datasheet Version="Rev. L, 08/2015", Density=134217728Bit, Interface Type=Serial(SPI), Manufacturer URL=http://www.winbond.com/hq/index.html?__locale=en, Mounting=SurfaceMount, Number of Words=16777216, Pin Count=8, Programmable=Yes, Rad Hardened=No, Sync/Async=Synchronous, Word Size=8b
Y1: library part CMP-27762-013691-1, "Crystal 8MHz ±20ppm 8pF SMD-2 6mm x 3.5mm", Case/Package=SMD/SMT, ESR (Equivalent Series Resistance)=80R, Frequency=8MHz, Frequency Stability=30ppm, Frequency Tolerance=20ppm, Load Capacitance=8pF, Max Operating Temperature=85°C, Min Operating Temperature=-40°C, Mount="Surface Mount", Packaging="Tape and Reel"

## Free pads (board coordinates)
  rect 3x2 smd: 3(120.8,96.325) 4(120.775,93.875)
  round 1 hole 3.2: MH(61.371,105.917) MH(61.446,64.244) MH(120.675,64.194) MH(120.7,105.842)

## Via types
v1: diameter 1, hole 0.6, Top Layer to Bottom Layer, 56 vias
v2: diameter 1.5, hole 1, Top Layer to Bottom Layer, 31 vias
v3: diameter 0.8, hole 0.711, Top Layer to Bottom Layer, 3 vias
v4: diameter 1, hole 0.711, Top Layer to Bottom Layer, 1 vias
v5: diameter 1, hole 0.8, Top Layer to Bottom Layer, 1 vias

## Nets (pads, with @x,y where several pads share a name; then routed paths per layer and width w, separated by ;. In a path a pad name is that pad's centre, name@x,y a point inside that pad or via, vN(x,y) a via of type N, cw(c..) or ccw(c..) an arc to the next point about the centre after c; other vN are vias at no path point)
3.3VA: C13.1 C14.2 FB1.2 U1.13 | length 8.3
  Top Layer w0.3: C14.2@89.2,76.35 90.325,77.475 90.325,77.828 91.027,78.529 U1.13
  Top Layer w0.5: FB1.2 86.9,73.85 86.9,75.8 C13.1 87,75.825 87.525,76.35 C14.2
5V_USB: D3.1 J3.1 R3.1 | length 55.7
  Top Layer w0.5: R3.1 109.861,70.318 109.861,70.219 111.355,68.725 v2(114.05,68.725) ; D3.1 115.5,100.575 118.5,100.575 v2(118.525,100.55) ; J3.1 118.6,83.725 119.2,84.325 119.2,88.325 v2(121.225,90.35)
  Bottom Layer w0.5: v2(114.05,68.725) 118.675,68.725 121.925,71.975 121.925,89.379 121.225,90.079 121.225,97.85 v2(118.525,100.55)
+5: C1.2 D3.3 J5.4 R7.2 U2.1 | length 79.8
  Top Layer w0.5: v1(90.31,63.856) 90.317,63.864 90.317,65.992 J5.4 ; v2(111.275,101.525) 111.287,101.537 D3.3@113.412,101.537 ; U2.1 C1.2 112.3,100.425 D3.3@113.412,101.537 ; R7.2 118.5,72.864 119.125,72.239 v2(119.125,72.05) ; D3.3@113.412,101.537 113.462,101.537 D3.3 113.425,101.55 D3.3@113.412,101.537
  Bottom Layer w0.5: v1(90.31,63.856) 90.365,63.856 91.221,63 99.603,63 101.853,65.25 108.118,65.25 114.918,72.05 v2(119.125,72.05) 116.2,74.975 116.2,99 113.675,101.525 v2(111.275,101.525)
BOOT: R6.1 SW1.1 SW1.2 U1.60 | length 29.1
  Top Layer w0.3: SW1.1 SW1.2 81.959,76.766 81.959,77.616 R6.1@81.075,78.5 ; R6.1 R6.1@81.075,78.5 ; v1(83.65,77.7) 83.553,77.7 82.753,78.5 R6.1@81.075,78.5 ; v1(94.282,84.029) 94.416,84.163 94.416,84.616 94.979,85.179 95.601,85.179 95.777,85.355 U1.60
  Bottom Layer w0.3: v1(83.65,77.7) 90.201,77.7 90.36,77.86 93.418,81.455 cw(c94.522,80.516) 93.443,81.484 94.388,82.538 94.388,83.512 94.375,83.525
CS: U1.20 U5.17 | length 29.1
  Top Layer w0.3: U5.17 70.793,72.008 72.755,70.046 72.843,69.958 91.55,69.9 91.912,69.912 95.277,73.277 U1.20
CSB_BARO: U1.42 U3.5 | length 23.1
  Top Layer w0.3: v1(100.75,82.229) 100.75,82.225 102.227,81.529 U1.42 ; v1(102.175,97.55) 102.175,96.275 103.15,95.3 103.15,95.05 103.3,94.9 U3.5
  Bottom Layer w0.3: v1(100.75,82.229) 100.561,82.229 100.333,82.457 100.234,82.457 99.315,83.376 99.315,83.503 99.317,83.802 99.321,83.86 ccw(c97.873,83.95) 99.322,84.024 99.319,84.081 99.382,94.682 102.175,97.475 v1(102.175,97.55)
EXT_5V: D3.2 J8.1 | length 8.5
  Top Layer w0.5: J8.1 109.8,103.05 110.725,103.975 113.95,103.975 115.425,102.5 D3.2
FRST: U1.38 U6.7 | length 15.2
  Top Layer w0.3: U1.38 104.651,79.529 105.151,80.029 105.74,80.029 106.286,80.575 113.847,80.575 114.875,79.547 114.875,78.535 114.175,77.835 U6.7
GND: C1.1 C2.1 C3.1 C4.1 C5.1 C6.1 C7.1 C8.1 C9.1 C10.2 C11.2 C12.2 C13.2 C14.1 C15.1 C16.1 C17.1 C18.1 C19.2 D1.1 D2.1 J1.EMITTER J3.5 J3.S1 J3.S2 J3.S3 J3.S4 J3.S5 J3.S6 J4.S1 J4.S2 J5.1 J5.S1 J5.S2 J6.6 J6.S1 J6.S2 J7.2 J7.S1 J7.S2 J8.2 pad.4 R2.1 R6.2 U1.12 U1.18 U1.63 U2.2 U3.2 U3.3 U4.3 U4.7 U4.10 U5.8 U5.16 U5.21 U5.23 U5.24 U6.4 | length 197.1
  Top Layer w0.3: v2(77.7,83.325) 80.95,86.575 86.239,86.575 v5(88.835,83.979) 87.534,83.979 C10.2 ; C11.2 87.372,80.251 89.007,80.251 v2(89.129,80.129) 89.129,77.821 C14.1 ; C14.1@89.2,77.8 90.429,79.029 92.812,79.029 93.127,79.344 93.127,80.415 94.236,81.525 95.408,81.525 95.778,81.895 97.805,81.895 97.949,81.751 98.8,80.9 v4(98.8,79.8) 98.148,79.148 97.447,79.148 96.425,78.127 96.425,77.227 95.578,76.379 95.152,76.379 95.15,76.377 94.903,76.377 94.901,76.379 94.652,76.379 94.65,76.377 94.575,76.377 94.277,76.079 U1.18 ; C18.1 94.277,88.623 U1.63 ; C16.1 107.05,88.071 108.079,89.1 ; 108.079,89.1 108.729,89.75 110.449,89.75 110.625,89.926 C2.1
  Top Layer w0.5: C13.2 86.913,77.838 89.112,77.838 C14.1 ; v3(90.375,71.2) 90.432,71.257 90.432,72.132 C5.1 C4.1 91.95,72.2 91.775,72.025 91.775,71.624 91.441,71.29 v3(91.441,71.209) ; J5.1 97.778,66 v1(98.728,65.05) 100.608,63.171 101.633,63.171 v1(101.728,63.075) ; C18.1 94.138,88.787 94.138,90.338 C17.1 ; v1@101.728,63.127 103.025,63.127 103.375,63.477 J6.S2 103.725,63.85 103.725,64.6 104.675,65.55 J6.6 ; C15.1 C16.1 ; U3.2 U3.3 105.762,93.637 107.788,93.637 C12.2 ; U6.4 106.875,75.295 111.67,70.5 v1(115.45,70.5) 115.45,70.375 116.1,69.725 116.1,68.1 114.771,66.771 113.771,66.771 v1(113.675,66.675) ; C1.1 110.675,98.5 111.35,97.825 U2.2 ; J6.S1 111.15,63.325 v1(112.5,63.325) ; J3.5 117.7,86.325 117.65,86.375 117.65,87.775 J3.S2 117.825,88.3 v1(117.825,90.35) 117.921,90.446 117.921,91.521 120.275,93.875 pad.4 ; v1(118.6,79.925) 118.55,79.975 118.55,81.375 J3.S1 119.755,81.925 120.03,82.2 J3.S5 J3.S3 J3.S4 J3.S6
  Bottom Layer w0.3: v2(78.975,74.375) 78.975,71.925 80.75,70.15 85.442,70.15 ; v3(90.375,71.2) 89.325,70.15 85.442,70.15 ; v4(98.8,79.8) 98.8,79.839 98.148,80.491 98.148,81.004 97.357,81.795 94.684,81.795 92.73,79.84 92.73,79.522 90.363,77.155 89.866,77.155 86.529,73.818 86.529,71.237 85.442,70.15
  Bottom Layer w0.5: v1(74.5,96.65) 74.513,96.638 75.913,96.638 v1(75.925,96.625) 75.95,96.6 77.2,96.6 v1(77.225,96.575) 81.252,100.602 81.252,101.281 v1(81.348,101.377) ; v1(81.325,102.55) 81.336,102.539 81.336,101.389 v1(81.348,101.377) ; v1(82.75,101.35) 82.736,101.364 81.362,101.364 v1(81.348,101.377) ; v1(85.975,102.1) 89.979,106.104 90.404,106.104 v1(90.5,106.2) ; v1(98.728,65.05) 102.135,68.456 103.035,68.456 v1(103.13,68.552) 103.13,69.915 v3(105.172,71.957) ; v1(112.5,63.325) 113.675,64.5 v1(113.675,66.675) ; v1(117.825,90.35) 117.825,90.215 117.325,89.715 117.325,81.975 118.6,80.7 v1(118.6,79.925)
GPS_RX: J5.3 U1.29 | length 23.8
  Top Layer w0.3: J5.3 91.325,65.525 92.075,64.775 96.086,64.775 96.411,64.45 v1(96.6,64.45) ; U1.29 99.777,76.079 100.643,76.945 100.643,77.396 v1(100.777,77.53)
  Bottom Layer w0.3: v1(96.6,64.45) 96.6,65.241 100.8,69.441 100.8,77.506 v1(100.777,77.53)
GPS_SCL: J5.6
GPS_SDA: J5.5
GPS_TX: J5.2 U1.30 | length 14.6
  Top Layer w0.3: J5.2 92.325,66.475 93.45,67.6 96.15,67.6 v1(96.2,67.55) ; v1(99.35,72.425) 100.277,73.352 U1.30
  Bottom Layer w0.3: v1(96.2,67.55) 96.334,67.684 97.134,67.684 99.35,69.9 v1(99.35,72.425)
I2C1_SCL_PI: J7.5 U1.58 | length 18.4
  Top Layer w0.3: U1.58 96.777,102.227 98.275,103.725 J7.5
I2C1_SDA_PI: J7.4 U1.59 | length 18.2
  Top Layer w0.3: U1.59 96.277,102.727 97.275,103.725 J7.4
INT: J6.5 U1.24 | length 16
  Top Layer w0.3: U1.24 97.277,69.148 99.226,67.199 99.314,67.111 105.064,67.111 105.675,66.5 J6.5
IRQ: U1.14 U5.22 | length 59.1
  Top Layer w0.3: U5.22 63.85,72.515 v1(63.85,74.65) ; U1.14 92.827,78.029 93.125,78.328 93.125,78.404 93.127,78.405 93.127,78.637 93.697,79.207 93.697,80.1 94.568,80.971 96.082,80.971 96.609,80.445 v1(96.798,80.445)
  Bottom Layer w0.3: v1(63.85,74.65) 63.85,75.925 65.45,77.525 70.125,77.525 72.589,75.061 72.589,71.861 74.85,69.6 91.646,69.6 93.125,71.079 93.125,78.594 93.23,78.698 93.23,79.633 94.568,80.971 96.082,80.971 96.609,80.445 v1(96.798,80.445)
LED1: R4.1 U1.56 | length 5.1
  Top Layer w0.3: U1.56 97.777,87.279 100.194,89.697 100.194,90.094 100.473,90.373 R4.1
LED2: R5.1 U1.57 | length 4.2
  Top Layer w0.3: U1.57 97.277,88.232 98.025,88.98 R5.1
MISO: U1.22 U5.19 | length 45.7
  Top Layer w0.3: v1(65.6,68.95) 67.993,68.9 92.567,68.9 92.664,68.988 96.277,72.601 U1.22 ; v1(66.075,75.65) 67.993,73.732 U5.19
  Bottom Layer w0.3: v1(65.6,68.95) 65.6,75.124 66.064,75.589 v1@66.064,75.639
MOSI: U1.23 U5.18 | length 47.4
  Top Layer w0.3: v1(67.05,67.175) 68.916,67.175 70.103,68.362 80.22,68.4 cw(c80.225,67.05) 80.225,68.4 92.774,68.4 92.871,68.488 96.777,72.394 U1.23 ; v1(69.3,75.7) 69.3,72.551 U5.18
  Bottom Layer w0.3: v1(67.05,67.175) 67.05,73.45 v1(69.3,75.7)
NetC8_2: C8.2 U1.47 | length 2.5
  Top Layer w0.3: U1.47 104.522,84.029 104.668,84.175 105.4,84.175 C8.2
NetC9_2: C9.2 U1.31 | length 2.5
  Top Layer w0.3: U1.31 100.777,73.148 101.075,72.85 C9.2
NetC10_1: C10.1 U1.5 Y1.1 | length 9.1
  Top Layer w0.3: Y1.1 84.375,85.15 85.175,84.35 85.175,84.14 86.366,82.949 C10.1 ; C10.1@87.281,82.949 87.701,82.529 U1.5
NetC11_1: C11.1 U1.6 Y1.2 | length 8.4
  Top Layer w0.3: Y1.2 84.8,81.625 C11.1 ; C11.1@87.281,81.625 87.685,82.029 U1.6
NetD1_2: D1.2 R4.2 | length 2.4
  Top Layer w0.3: R4.2 D1.2
NetD2_2: D2.2 R5.2 | length 2.6
  Top Layer w0.3: R5.2 R5.2@98.075,91.902
  Top Layer w0.5: R5.2@98.075,91.902 D2.2
NetJ1_BASE: J1.BASE R8.2 | length 1.3
  Top Layer w0.3: R8.2 121.885,76.465 J1.BASE
NetJ3_2: J3.2 R10.1 | length 3.7
  Top Layer w0.3: R10.1 115.65,83.95 116.075,84.375 J3.2
NetJ3_3: J3.3 R9.1 | length 3.8
  Top Layer w0.3: R9.1 115.4,85.775 116.125,85.05 117.85,85.05 J3.3
NetR2_2: R2.2 R3.2 U1.25 | length 16.5
  Top Layer w0.3: U1.25 97.777,70.495 99.019,69.252 R2.2 101.688,69.071 102.228,69.556 cw(c103.13,68.552) 102.238,69.565 103.095,70.32 105.565,70.347 107.935,70.375 108.339,70.375 R3.2
NRST: R1.1 U1.7 | length 21.9
  Top Layer w0.3: U1.7 92.691,81.529 92.951,81.729 93.856,82.55 94.975,82.55 95.816,83.391 95.816,83.426 96.075,83.686 v1(96.075,83.863) ; v1(99.175,97.55) 99.309,97.684 99.309,98.209 99.975,98.875 R1.1
  Bottom Layer w0.3: v1(96.075,83.863) 96.075,94.45 96.163,94.538 v1(99.175,97.55)
PA11: R10.2 U1.44 | length 10.1
  Top Layer w0.3: U1.44 104.504,82.529 105.15,83.175 110.725,83.175 111.5,83.95 R10.2
PA12: R9.2 U1.45 | length 10.6
  Top Layer w0.3: U1.45 104.229,83.029 104.875,83.675 110.475,83.675 112.575,85.775 R9.2
RTC_SQW: J7.6 U1.50 | length 25.7
  Top Layer w0.3: U1.50 100.777,87.214 102.813,89.25 v1(104.975,89.25)
  Top Layer w0.5: J7.6 v1(102,104.2)
  Bottom Layer w0.3: v1(102,104.2) 102,103.275 106.1,99.175 106.1,95.575 104.975,94.45 v1(104.975,89.25)
S1_MOTOR: J4.2 U1.17 | length 42.9
  Top Layer w0.3: v1(70.688,65.176) 70.741,65.229 73.254,65.229 74.9,66.875 J4.2 ; U1.17 93.777,76.629 94.936,77.788 v1(95.014,77.788)
  Bottom Layer w0.3: v1(70.688,65.176) 73.726,65.176 77.15,68.6 92.06,68.6 96.4,72.94 96.4,76.402 v1(95.014,77.788)
S2_MOTOR: J4.4 U1.26 | length 30.2
  Top Layer w0.3: J4.4 76.9,67.25 77.05,67.1 79.374,67.1 v1(80.225,67.05) ; v1(97.875,77.526) 97.875,77.337 98.277,76.935 U1.26
  Bottom Layer w0.3: v1(80.225,67.05) 80.3,67.125 91.292,67.125 97.787,73.62 97.875,73.708 v1(97.875,77.526)
S3_MOTOR: J4.3 U1.27 | length 39.2
  Top Layer w0.3: J4.3 75.9,66.875 77.475,65.3 v1(80.275,65.3) ; U1.27 98.777,76.079 99.325,76.628 99.325,78.175 100.346,79.196 100.656,79.196 v1(100.79,79.33)
  Bottom Layer w0.3: v1(80.275,65.3) 90.174,65.3 99.325,74.451 99.325,78.25 100.271,79.196 100.656,79.196 v1(100.79,79.33)
S4_MOTOR: J4.1 U1.16 | length 42.3
  Top Layer w0.3: v1(70.625,66.975) 73.75,66.975 73.9,67.125 J4.1 ; U1.16 92.827,77.029 93.625,77.828 93.625,78.196 93.627,78.198 93.627,78.388 94.725,79.487 94.993,79.487 v1(95.127,79.621)
  Bottom Layer w0.3: v1(70.625,66.975) 72.75,69.1 91.853,69.1 93.625,70.872 93.625,78.309 94.937,79.621 v1(95.127,79.621)
SBUS: pad.3 R8.1 | length 22.5
  Top Layer w0.3: v1(118.225,96.375) 120.75,96.375 pad.3 ; v1(120.3,79.925) 121.002,79.223 121.002,78.748 121.725,78.025 R8.1
  Bottom Layer w0.3: v1(118.225,96.375) 119.05,95.55 119.175,90.383 cw(c117.825,90.35) 119.175,90.33 119.05,82.049 119.05,81.8 119.138,81.712 120.166,80.684 120.166,80.059 v1(120.3,79.925)
SCK: U1.21 U5.20 | length 35.1
  Top Layer w0.3: U5.20 66.725,72.326 66.725,70.875 68.2,69.4 92.36,69.4 95.777,72.816 U1.21
SCL: U1.61 U4.5 | length 38.2
  Top Layer w0.3: U4.5 73.815,107.9 83.55,107.9 95.675,95.775 95.675,88.025 95.277,87.627 U1.61
SCL_BARO: U1.51 U3.8 | length 6.3
  Top Layer w0.3: U1.51 100.277,87.502 103.15,90.375 103.15,91 103.3,91.15 U3.8
SDA: U1.62 U4.4 | length 34.2
  Top Layer w0.3: U4.4 75.08,103.87 79.875,99.075 89.362,99.075 95.1,93.337 95.1,88.157 94.777,87.834 94.777,87.279 U1.62
SDA_BARO: U1.53 U3.7 | length 8.4
  Top Layer w0.3: U1.53 99.277,87.452 101.875,90.05 101.875,91.725 102.55,92.4 U3.7
SDO_BARO: U1.52 U3.6 | length 21.1
  Top Layer w0.3: U1.52 99.777,84.825 99.879,84.722 v1(100.772,84.029) ; U3.6 103.8,93.65 104.625,94.475 v1(104.625,96.9)
  Bottom Layer w0.3: v1(100.772,84.029) 103.152,86.405 103.325,86.578 103.325,95.6 v1(104.625,96.9)
SPI2_MISO_PI: U1.35 U6.2 | length 3.2
  Top Layer w0.3: U1.35 104.234,78.029 104.428,77.835 U6.2
SPI2_MOSI_PI: U1.36 U6.5 | length 14.8
  Top Layer w0.3: U1.36 107.346,78.529 108.584,77.291 114.284,77.291 114.85,76.725 114.85,76 114.145,75.295 U6.5
SPI2_NSS_PI: U1.33 U6.1 | length 12
  Top Layer w0.3: U1.33 103.15,77.029 v1(103.15,75.575) ; U6.1 108.806,79.105 109.036,78.875 v1(109.225,78.875)
  Bottom Layer w0.3: v1(103.15,75.575) 106.45,78.875 v1(109.225,78.875)
SPI2_SCK_PI: U1.34 U6.6 | length 10.8
  Top Layer w0.3: U1.34 104.027,77.529 104.331,77.225 107.493,77.225 107.927,76.791 112.604,76.791 112.83,76.565 U6.6
TOF_SCL: J6.2 U1.41 | length 38.3
  Top Layer w0.3: U1.41 104.027,81.029 104.527,81.529 105.118,81.529 105.664,82.075 114.468,82.075 116.375,80.168 116.375,76.525 117.525,75.375 117.525,67.825 114.375,64.675 109.55,64.675 108.675,65.55 J6.2
TOF_SDA: J6.1 U1.40 | length 35.4
  Top Layer w0.3: U1.40 104.236,80.529 104.736,81.029 105.326,81.029 105.871,81.575 114.261,81.575 115.875,79.961 115.875,76.018 116.975,74.918 116.975,67.982 114.168,65.175 110.05,65.175 109.675,65.55 J6.1
UART1_RX: J1.COLLECTOR R7.1 U1.43 | length 24.3
  Top Layer w0.3: U1.43 104.729,82.029 105.375,82.675 114.575,82.675 116.875,80.375 116.875,77.341 118.23,75.986 118.23,75.386 118.411,75.204 R7.1 ; R7.1@118.599,75.204 120.506,73.298 J1.COLLECTOR
UWB_RST: U1.2 U5.3 | length 30.7
  Top Layer w0.3: U5.3 63.793,85.208 65.71,87.125 86.563,87.125 88.013,85.675 89.325,85.675 90.971,84.029 U1.2
VDD: C2.2 C3.2 C4.2 C5.2 C6.2 C7.2 C12.1 C15.2 C16.2 C17.2 C18.2 C19.1 FB1.1 J6.3 J7.3 R1.2 SW1.3 SW1.4 U1.1 U1.19 U1.32 U1.48 U1.64 U2.5 U3.1 U4.1 U4.6 U4.8 U5.5 U5.6 U5.7 U6.8 | length 100.8
  Top Layer w0.3: C3.2 89.7,86.875 91.178,85.397 91.178,84.529 U1.1 ; C4.2 94.047,73.55 94.777,74.279 U1.19 ; C18.2@92.775,88.7 93.05,88.425 93.125,88.425 93.777,87.773 U1.64 ; U1.32 101.277,74.398 101.877,74.398 102.775,73.5 C7.2 ; U1.48 103.933,84.529 103.954,84.551 103.954,85.06 104.594,85.7 C15.2
  Top Layer w0.5: v2(66.175,82.25) 66.175,82.521 66.6,82.946 U5.5 ; U5.6 67.996,84.754 67.996,82.279 v2(68,82.275) ; U5.7 69.393,82.953 69.825,82.521 v2(69.825,82.25) ; U4.6 70.05,106.575 70.05,104.425 v2(70.1,104.375) ; SW1.3 SW1.4 82.15,72.346 82.984,73.179 82.984,73.459 v2(83.175,73.65) ; v2(77.45,91.45) 77.535,91.365 77.535,88.93 U4.8 ; U4.1 82.75,106.575 82.75,104.4 v2(82.8,104.35) ; v2(84.522,75.357) 84.522,75.086 84.975,74.633 84.975,73.975 85.2,73.75 v2@85.2,71.975 ; v2(84.929,71.9) v2(88.129,71.9) ; v2(86.825,91.05) 86.9,91.125 88.7,91.125 v2(88.775,91.2) 89.046,91.2 89.494,90.752 C19.1 ; v2@88.8,91.225 88.8,93 v2(88.825,93.025) ; v2(89.099,74.125) 89.369,74.125 89.769,73.725 90.325,73.725 C5.2 C4.2 91.95,73.55 91.775,73.725 91.775,74.279 91.25,74.804 v2(91.25,75.075) ; C3.2 89.738,86.912 91.563,86.912 v2(91.6,86.875) ; C19.1@90.975,90.654 91.279,90.35 C17.2 92.788,90.338 92.788,88.787 C18.2 ; J7.3 v1(96.275,106.325) ; R1.2 99.975,100.675 100.579,101.279 101.329,101.279 v1(101.425,101.375) ; C7.2 C6.2 104.65,73.504 v2(106.187,73.504) ; v1(104.918,68.99) 105.053,68.99 105.669,69.606 108.869,69.606 v1(111.697,66.778) ; C15.2 108.3,85.7 108.3,85.725 109.1,86.525 v2(109.1,86.796) ; U3.1 106,91.15 107.15,92.3 107.675,92.3 C12.1 107.888,92.338 107.888,91.583 107.375,91.071 v2(107.375,90.8) ; v2(107.5,63.525) 107.625,63.65 107.625,65.975 J6.3 ; v2@108.99,86.796 109.01,86.796 110.175,87.96 v2(110.175,88.05) ; v1(111.65,79) 111.703,79.053 113.498,79.053 U6.8 ; U2.5 112.3,90.85 112.512,90.637 112.512,89.063 v2(112.7,88.875)
  Bottom Layer w0.5: v2(106.187,73.504) 106.187,73.339 107.348,72.178 v2(107.348,72.013)
WrPT: U1.39 U6.3 | length 27.8
  Top Layer w0.3: U1.39 104.443,80.029 104.943,80.529 105.533,80.529 106.078,81.075 114.054,81.075 115.375,79.754 115.375,75.818 113.907,74.35 109.05,74.35 106.835,76.565 U6.3
XSHUT: J6.4 U1.8 | length 41.8
  Top Layer w0.3: U1.8 92.898,81.029 93.144,81.229 93.979,81.974 94.065,82.05 95.226,82.05 95.601,82.425 96.882,82.425 97.739,83.283 97.739,83.816 v1(97.873,83.95) ; J6.4 106.694,66.044 106.694,68 v1(106.714,68.019)
  Bottom Layer w0.3: v1(97.873,83.95) 98.645,83.164 99.297,82.5 99.297,81.628 100.144,80.781 100.268,80.78 100.712,80.78 100.727,80.779 ccw(c100.75,82.229) 100.773,80.779 100.783,80.78 103.475,80.775 112.375,80.775 113.475,79.675 113.475,75.877 107.238,69.639 106.714,69.115 v1(106.714,68.019)
pads on no net: J3. J3.4 J7.1 J8.3 J8.4 U1.3 U1.4 U1.9 U1.10 U1.11 U1.15 U1.28 U1.37 U1.46 U1.49 U1.54 U1.55 U2.3 U2.4 U3.4 U4.2 U4.9 U5.1 U5.2 U5.4 U5.9 U5.10 U5.11 U5.12 U5.13 U5.14 U5.15

## Polygon pours and split planes (outlines as drawn)
VDD on Bottom Layer "NONET_L02_P-001" (solid, pour order 2): 60.948,108.173 119.473,108.173 119.548,108.098 122.028,108.098 122.851,107.275 122.95,63.542 121.712,61.825 119.323,61.748 60.773,61.748 59.223,63.298 59.223,69.648 59.398,69.823 59.223,69.823 59.223,78.073 59.598,78.448 90.148,78.448 90.148,78.473 90.773,79.098 90.723,79.148 90.723,81.498 93.473,81.498 93.548,81.573 93.498,81.623 93.498,82.798 90.373,82.798 90.073,83.098 90.073,85.398 87.223,85.398 87.198,85.373 86.948,85.623 86.948,86.898 81.123,86.898 81.098,86.873 81.123,86.848 81.123,78.448 59.173,78.448 59.223,78.498 59.223,106.998 60.273,108.048
GND on Bottom Layer "NONET_L02_P-001" (solid, pour order 1): 93.125,82.675 93.125,81.875 89.625,81.875 89.625,79.5 81.625,79.5 81.625,86.6 86.5,86.6 86.525,86.575 86.525,85 88.375,85 89.625,85 89.625,82.675
GND on Top Layer "NONET_L02_P-001" (solid, pour order 3): 60.8,108.275 122.1,108.275 122.95,107.425 122.95,62.719 122.056,61.825 60.55,61.825 59.075,63.3 59.075,78.075 59.05,78.1 60.025,79.075 90.1,79.075 90.1,81.675 92.975,81.675 93.1,81.8 93.1,82.775 90.1,82.775 90.075,82.8 90.075,85.35 86.925,85.35 86.925,87.05 81.25,87.05 81.225,87.075 81.22,87.07 81.22,79.07 60.02,79.07 59.075,78.125 59.075,106.825 59.15,106.9 59.15,107.175 60.275,108.3 60.775,108.3

## Other copper
Top Layer:
  text "EXT_POWER" at 105.133,102.25 h0.4 r90
  text "5V" at 108.025,101.525 h0.5
  text "GND" at 105.95,101.425 h0.5
  text "SBUS" at 119.9,97.6 h0.5
  text "GND" at 120,92 h0.5

## Silkscreen, mask and mechanical layers (free items; w line width, h text height)
Mechanical 1: